# EAGLE board WBDR_02 (EAGLE 9.6.2)
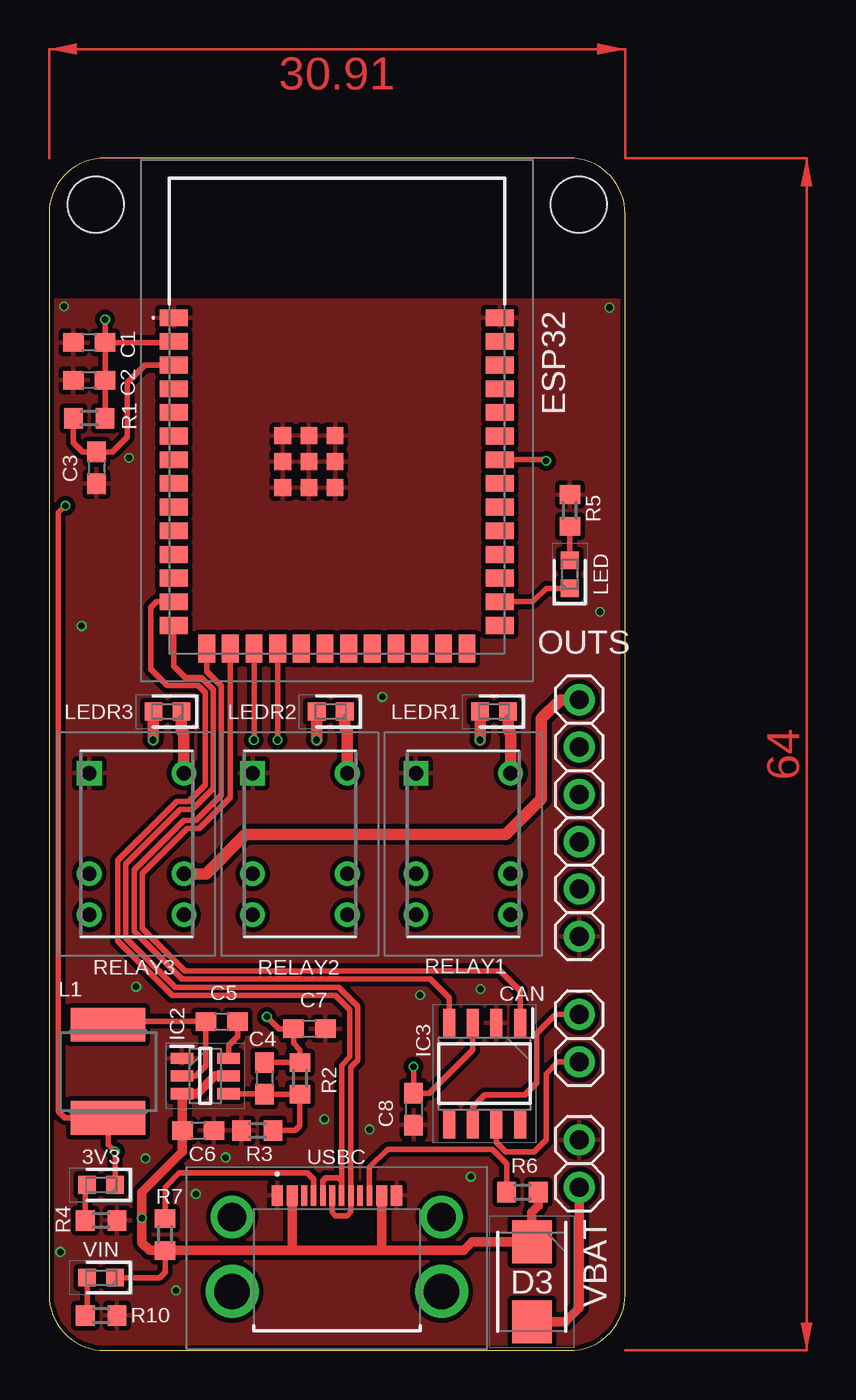
[diagram p0: board, top side]
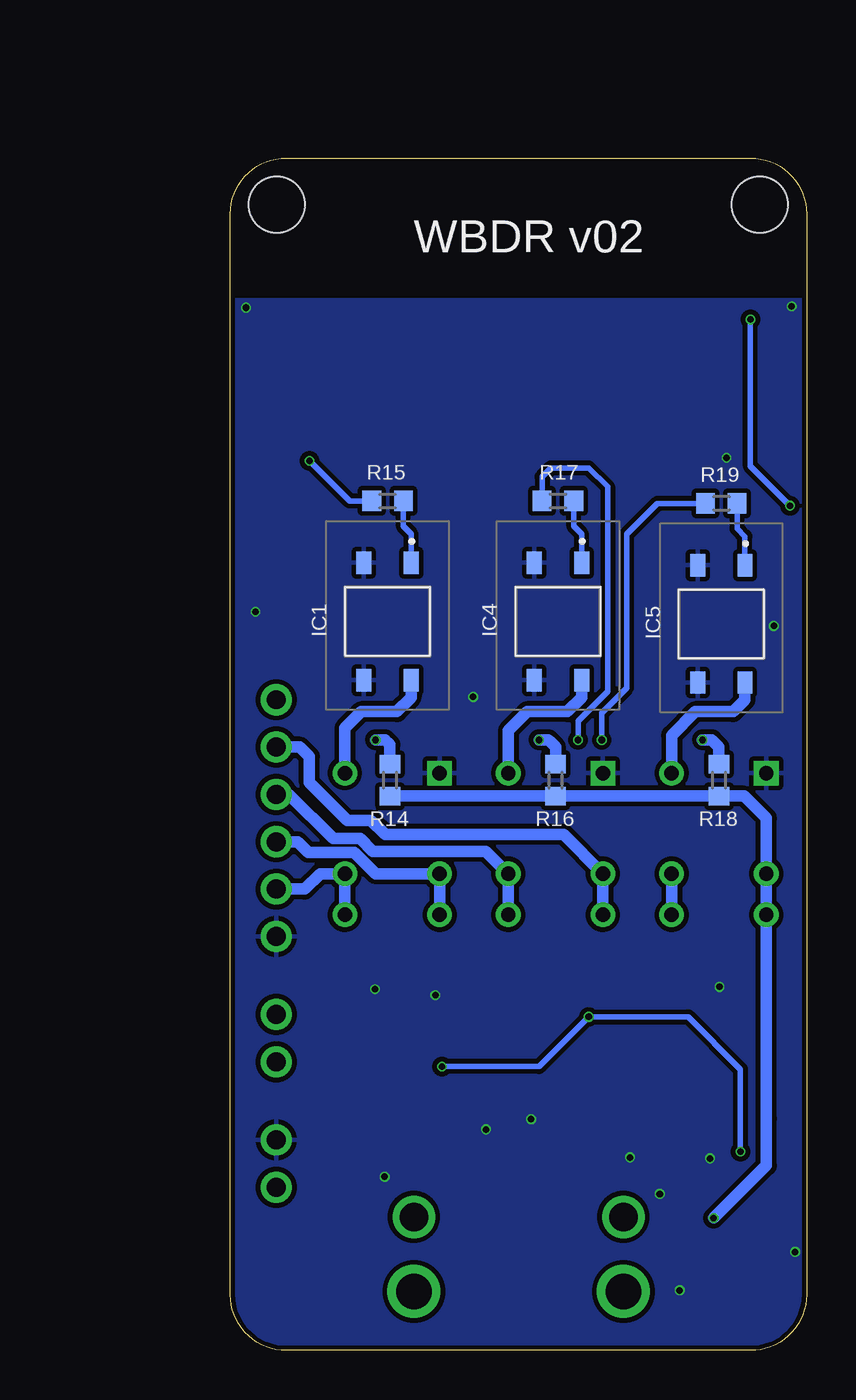
[diagram p1: board, bottom side, seen from below]

Size 30.91 x 64 mm. Coordinates in mm from the lower left corner, seen from the top.
Outline: 30.91,3 30.91,61 arc90 27.91,64 3,64 arc90 0,61 0,3 arc90 3,0 27.91,0 arc90 30.91,3
Copper layers (1*16): Top 0.035559375mm / dielectric 1.6mm / Bottom 0.035559375mm
Design rules "jlcpcb2layer": minimum track width 5mil, minimum drill 12mil, track to track 5mil, track to pad 5mil, pad to pad 5mil, via to via 5mil, smd to smd 5mil, copper to edge 8mil, drill to drill 6mil, minimum pad ring 5mil, minimum via ring 3mil, stop-mask expansion 2.5mil, vias tented up to drill 0mil, thermal gap 10mil
Holes 3 mm at 2.51,61.5 28.42,61.5

## Footprints (pad centres in the part's own frame; a part is rotated, then mirrored left to right if it is on the bottom)
LEDC1608X80N = smd 0.95 x 0.95: 1 -0.75,0; 2 0.75,0
C0603 = smd 1.1 x 1: 1 -0.85,0; 2 0.85,0
1X02 = drill 1.016 pad 1.676: 1 -1.27,0; 2 1.27,0
DIOM5336X320N = smd 2.3 x 2.1: 1 -2.15,0; 2 2.15,0
ESP32S3WROOM1N16 = smd 1.5 x 0.9: 1 -8.75,5.26; 2 -8.75,3.99; 3 -8.75,2.72; 4 -8.75,1.45; 5 -8.75,0.18; 6 -8.75,-1.09; 7 -8.75,-2.36; 8 -8.75,-3.63; 9 -8.75,-4.9; 10 -8.75,-6.17; 11 -8.75,-7.44; 12 -8.75,-8.71; 13 -8.75,-9.98; 14 -8.75,-11.25; 27 8.75,-11.25; 28 8.75,-9.98; 29 8.75,-8.71; 30 8.75,-7.44; 31 8.75,-6.17; 32 8.75,-4.9; 33 8.75,-3.63; 34 8.75,-2.36; 35 8.75,-1.09; 36 8.75,0.18; 37 8.75,1.45; 38 8.75,2.72; 39 8.75,3.99; 40 8.75,5.26 | smd 0.9 x 1.5: 15 -6.985,-12.5; 16 -5.715,-12.5; 17 -4.445,-12.5; 18 -3.175,-12.5; 19 -1.905,-12.5; 20 -0.635,-12.5; 21 0.635,-12.5; 22 1.905,-12.5; 23 3.175,-12.5; 24 4.445,-12.5; 25 5.715,-12.5; 26 6.985,-12.5 | smd 0.9 x 0.9: 41 -1.5,-2.46; 42 -1.5,-1.06; 43 -2.9,-1.06; 44 -2.9,-2.46; 45 -2.9,-3.86; 46 -1.5,-3.86; 47 -0.1,-3.86; 48 -0.1,-2.46; 49 -0.1,-1.06
TLP266J = smd 1.2 x 0.8: 1 -2.525,1.27; 3 -2.525,-1.27; 4 3.775,-1.27; 6 3.775,1.27
SOT95P280X90-6N = smd 1.2 x 0.6: 1 -1.25,0.95; 2 -1.25,0; 3 -1.25,-0.95; 4 1.25,-0.95; 5 1.25,0; 6 1.25,0.95
SOIC127P600X175-8N = smd 1.528 x 0.65: 1 -2.711,1.905; 2 -2.711,0.635; 3 -2.711,-0.635; 4 -2.711,-1.905; 5 2.711,-1.905; 6 2.711,-0.635; 7 2.711,0.635; 8 2.711,1.905
L5650M = smd 1.8 x 4: 1 -2.5,0; 2 2.5,0
1X06 = drill 1.016 pad 1.676: 1 -6.35,0; 2 -3.81,0; 3 -1.27,0; 4 1.27,0; 5 3.81,0; 6 6.35,0
R0603 = smd 1 x 1.1: 1 -0.85,0; 2 0.85,0
14620438 = drill 0.77 pad 1.32 square: 1 0,0 | drill 0.77 pad 1.32: 3 5.4,0; 4 7.6,0; 5 7.6,5.08; 6 5.4,5.08; 8 0,5.08
2169900003 = smd 0.6 x 1.1: A1 -3.2,4; A4 -2.4,4; A9 2.4,4; A12 3.2,4 | smd 0.3 x 1.1: A5 -1.25,4; A6 -0.25,4; A7 0.25,4; A8 1.25,4; B5 1.75,4; B6 0.75,4; B7 -0.75,4; B8 -1.75,4 | drill 1.52 pad 2.28: MH1 -5.62,2.85; MH4 5.62,2.85 | drill 1.9 pad 2.85: MH2 -5.62,-1.15; MH3 5.62,-1.15

## Placement (x,y rotation side)
3V3  150060GS75000  [LEDC1608X80N]  2.79,8.89 180 top
C1  20uF  [C0603]  2.16,54.1 180 top
C2  0.1uF  [C0603]  2.16,52.07 180 top
C3  0.1uF  [C0603]  2.54,47.37 270 top
C4  22pF  [C0603]  11.56,14.61 270 top
C5  100nF  [C0603]  9.27,17.65 0 top
C6  10uF  [C0603]  8,11.81 0 top
C7  22uF  [C0603]  13.97,17.27 0 top
C8  0.1uF  [C0603]  19.56,12.95 270 top
CAN  [1X02]  28.45,16.76 90 top
D3  SS34B-HF  [DIOM5336X320N]  25.91,3.68 270 top
ESP32  ESP32-S3-WROOM-1-N16  [ESP32S3WROOM1N16]  15.44,50.16 0 top
IC1  TLP175A_TPL,E  [TLP266J]  22.48,39.75 270 bottom
IC2  DIO6970TST6  [SOT95P280X90-6N]  8.38,14.73 0 top
IC3  SN65HVD232D  [SOIC127P600X175-8N]  23.37,14.86 270 top
IC4  TLP175A_TPL,E  [TLP266J]  13.34,39.75 270 bottom
IC5  TLP175A_TPL,E  [TLP266J]  4.57,39.62 270 bottom
L1  4.7uH  [L5650M]  3.17,14.99 90 top
LED  150060GS75000  [LEDC1608X80N]  27.94,41.66 90 top
LEDR1  150060GS75000  [LEDC1608X80N]  23.88,34.29 180 top
LEDR2  150060GS75000  [LEDC1608X80N]  15.11,34.29 180 top
LEDR3  150060GS75000  [LEDC1608X80N]  6.35,34.29 180 top
OUTS  [1X06]  28.45,28.57 270 top
R1  10k  [R0603]  2.16,50.04 0 top
R2  40.2k  [R0603]  13.46,14.61 90 top
R3  13k  [R0603]  11.18,11.81 0 top
R4  330  [R0603]  2.79,6.99 0 top
R5  330  [R0603]  27.94,45.09 90 top
R6  5.1k  [R0603]  25.4,8.51 180 top
R7  5.1k  [R0603]  6.22,6.22 270 top
R10  330  [R0603]  2.79,1.88 0 top
R14  2k4  [R0603]  22.35,30.61 270 bottom
R15  330  [R0603]  22.48,45.59 0 bottom
R16  2k4  [R0603]  13.46,30.61 270 bottom
R17  330  [R0603]  13.34,45.59 0 bottom
R18  2k4  [R0603]  4.7,30.61 270 bottom
R19  330  [R0603]  4.57,45.47 0 bottom
RELAY1  1462043-8  [14620438]  19.68,30.99 270 top
RELAY2  1462043-8  [14620438]  10.92,30.99 270 top
RELAY3  1462043-8  [14620438]  2.16,30.99 270 top
USBC  216990-0003  [2169900003]  15.44,4.32 0 top
VBAT  [1X02]  28.45,10.03 90 top
VIN  150060GS75000  [LEDC1608X80N]  2.79,3.91 180 top

## Library data of the parts
3V3 LED LEDR1-LEDR3 VIN = SamacSys_Parts; DESCRIPTION: Wurth Elektronik WL-SMCW 520 nm Green LED, 1608 (0603) Clear SMD package; HEIGHT: 0.8mm; MANUFACTURER_NAME: Wurth Elektronik; MANUFACTURER_PART_NUMBER: 150060GS75000; MOUSER_PART_NUMBER: 710-150060GS75000; MOUSER_PRICE-STOCK: https://www.mouser.co.uk/ProductDetail/Wurth-Elektronik/150060GS75000?qs=LlUlMxKIyB0UYkq5lDO8nA%3D%3D
C1-C8 = rcl
CAN OUTS VBAT = pinhead
D3 = SamacSys_Parts; DESCRIPTION: Schottky Diodes & Rectifiers DIODE SCHOTTKY 3A 40V SMB; HEIGHT: 3.2mm; MANUFACTURER_NAME: Comchip Technology; MANUFACTURER_PART_NUMBER: SS34B-HF; MOUSER_PART_NUMBER: 750-SS34B-HF; MOUSER_PRICE-STOCK: https://www.mouser.co.uk/ProductDetail/Comchip-Technology/SS34B-HF?qs=vmHwEFxEFR9G1M%252BcUPG%2FxQ%3D%3D
ESP32 = ESP32-S3-WROOM-1-N16; DESCRIPTION: WiFi Modules - 802.11 [Engineering Samples] SMD Module, ESP32-S3, 16 MB SPI Flash, PCB Antenna; HEIGHT: 3.25mm; MANUFACTURER_NAME: Espressif Systems; MANUFACTURER_PART_NUMBER: ESP32-S3-WROOM-1-N16; MOUSER_PART_NUMBER: 356-ESP32S3WROOM1N16; MOUSER_PRICE-STOCK: https://www.mouser.co.uk/ProductDetail/Espressif-Systems/ESP32-S3-WROOM-1-N16?qs=Li%252BoUPsLEntjPrtJwwS5Pw%3D%3D
IC1 IC4 IC5 = SamacSys_Parts; DESCRIPTION: MOSFET Output Optocouplers Trigger LED Current 1mA85dC3750 Vrms; HEIGHT: 2mm; MANUFACTURER_NAME: Toshiba; MANUFACTURER_PART_NUMBER: TLP175A(TPL,E; MOUSER_PART_NUMBER: 757-TLP175A(TPLE; MOUSER_PRICE-STOCK: https://www.mouser.co.uk/ProductDetail/Toshiba/TLP175ATPLE?qs=HVbQlW5zcXXp9ILK7hvmMw%3D%3D
IC2 = SamacSys_Parts; DESCRIPTION: Switching Voltage Regulators 2A Step Converter 24V Input Sync; HEIGHT: 0.9mm; MANUFACTURER_NAME: DIOO Microcircuits; MANUFACTURER_PART_NUMBER: DIO6970TST6; MOUSER_PART_NUMBER: 453-DIO6970ST6; MOUSER_PRICE-STOCK: https://www.mouser.co.uk/ProductDetail/DIOO-Microcircuits/DIO6970TST6?qs=%252BEew9%252B0nqrCWpKu8WqElxA%3D%3D
IC3 = SamacSys_Parts; DESCRIPTION: CAN Transceiver 1Mbit/s ISO 11898, 8-Pin SOIC; HEIGHT: 1.75mm; MANUFACTURER_NAME: Texas Instruments; MANUFACTURER_PART_NUMBER: SN65HVD232D; MOUSER_PART_NUMBER: 595-SN65HVD232D; MOUSER_PRICE-STOCK: https://www.mouser.co.uk/ProductDetail/Texas-Instruments/SN65HVD232D?qs=QViXGNcIEAueLIS9b8IyYg%3D%3D
L1 = rcl; SPICEPREFIX: L
R1-R7 R10 R14-R19 = rcl; SPICEPREFIX: R
RELAY1-RELAY3 = SamacSys_Parts; DESCRIPTION: Low Signal Relays - PCB IME06TS=140MW 12V 2NO; HEIGHT: 5.65mm; MANUFACTURER_NAME: TE Connectivity; MANUFACTURER_PART_NUMBER: 1462043-8; MOUSER_PART_NUMBER: 655-1462043-8; MOUSER_PRICE-STOCK: https://www.mouser.co.uk/ProductDetail/TE-Connectivity-PB/1462043-8/?qs=kSbAZawwBnx8XxDvaHw46A%3D%3D
USBC = SamacSys_Parts; DESCRIPTION: USB Connectors Mid-Mnt SMT CH0.58 16Ckt Type C Rec.; HEIGHT: 3.36mm; MANUFACTURER_NAME: Molex; MANUFACTURER_PART_NUMBER: 216990-0003; MOUSER_PART_NUMBER: 538-216990-0003; MOUSER_PRICE-STOCK: https://www.mouser.co.uk/ProductDetail/Molex/216990-0003?qs=DRkmTr78QASn0GILUGAYCA%3D%3D

## Nets
+3V3: 3V3.1 C1.1 C2.1 C4.1 C7.1 C8.1 ESP32.2 IC3.3 L1.1 R1.2 R2.2
BS: C5.2 IC2.6
CANH: CAN.1 IC3.7
CANL: CAN.2 IC3.6
CANRX: ESP32.15 IC3.4
CANTX: ESP32.16 IC3.1
CC1: R7.1 USBC.A5
CC2: R6.2 USBC.B5
COIL1: IC1.6 LEDR1.1 RELAY1.8
COIL2: IC4.6 LEDR2.1 RELAY2.8
COIL3: IC5.6 LEDR3.1 RELAY3.8
EN: C3.1 ESP32.3 R1.1
FB: C4.2 IC2.4 R2.1 R3.2
GND: C1.2 C2.2 C3.2 C6.2 C7.2 C8.2 ESP32.1 ESP32.40 ESP32.41 ESP32.42 ESP32.43 ESP32.44 ESP32.45 ESP32.46 ESP32.47 ESP32.48 ESP32.49 IC1.3 IC1.4 IC2.1 IC3.2 IC4.3 IC4.4 IC5.3 IC5.4 OUTS.6 R3.1 R4.2 R5.2 R10.2 RELAY1.1 RELAY2.1 RELAY3.1 USBC.A1 USBC.A12 VBAT.2
IN1: OUTS.5 RELAY1.5 RELAY1.6
IN2: OUTS.3 RELAY2.5 RELAY2.6
LDR1: 3V3.2 R4.1
LDR2: LED.2 R5.1
LDR3: R10.1 VIN.2
LED2: ESP32.28 LED.1
LEDCOIL1: LEDR1.2 R14.1
LEDCOIL2: LEDR2.2 R16.1
LEDCOIL3: LEDR3.2 R18.1
O1: OUTS.4 RELAY1.3 RELAY1.4
O2: OUTS.2 RELAY2.3 RELAY2.4
O3: OUTS.1 RELAY3.5 RELAY3.6
OUT1: ESP32.34 R15.1
OUT2: ESP32.18 R17.1
OUT3: ESP32.17 R19.1
OUTO1: IC1.1 R15.2
OUTO2: IC4.1 R17.2
OUTO3: IC5.1 R19.2
RX: ESP32.36
SW: C5.1 IC2.2 L1.2
TX: ESP32.37
USBD+: ESP32.14 USBC.A6 USBC.B6
USBD-: ESP32.13 USBC.A7 USBC.B7
VEXT: D3.2 VBAT.1
VIN: C6.1 D3.1 IC2.3 IC2.5 R6.1 R7.2 R14.2 R16.2 R18.2 RELAY3.3 RELAY3.4 USBC.A4 USBC.A9 VIN.1

## Tracks (layer width: path | path; a pad name or v marks a point on that pad's centre or on a via)
+3V3  (via drill 0.35)
  Top 0.305: C4.1 R2.2 13.46,16.13 13.12,16.47 C7.1 12.32,17.27 v11.68,17.91 | C1.1 C2.1 R1.2 | ESP32.2 6.44,54.1 C1.1 | IC3.3 22.73,16.13 20.41,13.8 C8.1 v19.56,15.24 | 3V3.1 v3.54,10.68 3.17,11.05 L1.1 0.85,12.49 0.51,12.83 0.51,44.96 v0.89,45.34 | C1.1 v3.01,55.33
  Bottom 0.305: v19.56,15.24 14.35,15.24 v11.68,17.91 6.35,17.91 3.54,15.1 v3.54,10.68 | v0.89,45.34 3.01,47.46 v3.01,55.33
BS
  Top 0.305: IC2.6 9.63,16.36 10.12,16.85 C5.2
CANH
  Top 0.305: IC3.7 24,11.18 24.51,10.67 26.04,10.67 26.67,11.3 26.67,14.86 27.3,15.49 CAN.1
CANL
  Top 0.305: IC3.6 22.73,13.08 23.37,13.72 25.53,13.72 26.16,14.35 26.16,17.02 27.18,18.03 CAN.2
CANRX
  Top 0.305: IC3.4 21.46,18.92 20.45,19.94 7.11,19.94 4.57,22.48 4.57,25.78 7.24,28.45 7.87,28.45 9.25,29.82 9.25,35.66 8.46,36.45 ESP32.15
CANTX
  Top 0.305: IC3.1 25.27,19.3 24.21,20.37 7.29,20.37 5,22.66 5,25.6 7.42,28.02 8.05,28.02 9.73,29.69 ESP32.16
CC1
  Top 0.305: R7.1 6.22,8.76 6.99,9.53 13.84,9.53 14.19,9.18 USBC.A5
CC2
  Top 0.305: USBC.B5 17.19,9.83 18.16,10.79 23.77,10.79 24.55,10.02 R6.2
COIL1
  Top 0.61: RELAY1.8 24.77,33.13 24.63,33.27 LEDR1.1
  Bottom 0.61: IC1.6 21.21,35.05 21.97,34.29 23.88,34.29 24.77,33.4 RELAY1.8
COIL2
  Top 0.61: LEDR2.1 15.86,33.4 16,33.26 RELAY2.8
  Bottom 0.61: IC4.6 12.06,35.05 12.83,34.29 14.99,34.29 16,33.27 RELAY2.8
COIL3
  Top 0.61: RELAY3.8 7.24,33.15 7.1,33.29 LEDR3.1
  Bottom 0.61: IC5.6 3.3,34.92 3.94,34.29 5.97,34.29 7.24,33.02 RELAY3.8
EN
  Top 0.305: R1.1 1.31,48.73 1.82,48.22 C3.1 3.39,48.22 4.19,49.02 4.19,51.94 5.13,52.88 ESP32.3
FB
  Top 0.305: IC2.4 11.53,13.78 C4.2 R2.1 13.46,12.06 13.21,11.81 R3.2
GND  (via drill 0.35)
  other vias: 9.47,10.36 6.81,3.23 0.61,5.3 17.2,11.86 7.87,8.41 22.63,9.32 5.18,10.31 14.77,12.41 23.15,19.39 19.91,19.08 4.67,19.52 17.88,35.08 4.29,47.9 30.07,55.97 0.8,56.03 29.57,39.65 1.75,38.89
  pour Top (isolate 0.254): 0,56.39 30.99,56.39 30.99,0 0,0
  pour Bottom (isolate 0.254): 0,56.39 30.99,56.39 30.99,0 0,0
IN1
  Bottom 0.61: RELAY1.5 RELAY1.6 26.1,25.59 26.92,24.77 OUTS.5
IN2
  Bottom 0.61: RELAY2.5 RELAY2.6 17.21,26.8 23.28,26.8 23.95,27.47 25.4,27.47 27.77,29.84 OUTS.3
LDR1
  Top 0.305: R4.1 1.94,8.79 3V3.2
LDR2
  Top 0.305: LED.2 R5.1
LDR3
  Top 0.305: VIN.2 2.04,1.98 R10.1
LED2
  Top 0.305: ESP32.28 25.96,40.19 26.68,40.91 LED.1
LEDCOIL1  (via drill 0.35)
  Top 0.61: LEDR1.2 23.13,32.78 v23.11,32.77
  Bottom 0.305: 22.48,32.64 22.61,32.77
  Bottom 0.61: R14.1 22.35,32.51 22.48,32.64 | 22.61,32.77 v23.11,32.77
LEDCOIL2  (via drill 0.35)
  Top 0.61: LEDR2.2 14.36,32.78 v14.35,32.77
  Bottom 0.305: 13.78,32.7 13.84,32.77
  Bottom 0.61: R16.1 13.46,32.38 13.78,32.7 | 13.84,32.77 v14.35,32.77
LEDCOIL3  (via drill 0.35)
  Top 0.61: LEDR3.2 5.59,34.28 v5.59,32.77
  Bottom 0.61: R18.1 4.7,32.38 5.08,32.77 v5.59,32.77
O1
  Bottom 0.61: RELAY1.4 RELAY1.3 23.11,25.59 24.26,26.73 26.73,26.73 27.3,27.3 OUTS.4
O2
  Bottom 0.61: RELAY2.4 RELAY2.3 13.02,27.69 22.61,27.69 23.37,28.45 24.64,28.45 26.67,30.48 26.67,31.88 27.18,32.38 OUTS.2
O3
  Top 0.61: OUTS.1 27.43,34.92 26.42,33.91 26.42,29.59 24.51,27.69 10.54,27.69 8.44,25.59 RELAY3.6
  Bottom 0.61: RELAY3.6 RELAY3.5
OUT1  (via drill 0.35)
  Top 0.305: v26.67,47.75 26.62,47.8 ESP32.34
  Bottom 0.305: R15.1 24.51,45.59 v26.67,47.75
OUT2  (via drill 0.35)
  Top 0.305: ESP32.18 v12.27,32.78 v12.26,32.77
  Bottom 0.305: R17.1 14.19,46.9 13.72,47.37 11.68,47.37 10.67,46.35 10.67,35.37 12.26,33.78 v12.26,32.77
OUT3  (via drill 0.35)
  Top 0.305: ESP32.17 v11,32.78 v10.99,32.77
  Bottom 0.305: R19.1 8,45.47 9.65,43.81 9.65,35.56 10.99,34.23 v10.99,32.77
OUTO1
  Bottom 0.305: IC1.1 21.21,43.81 21.63,44.23 R15.2
OUTO2
  Bottom 0.305: IC4.1 12.06,43.81 12.48,44.23 R17.2
OUTO3
  Bottom 0.305: IC5.1 3.3,43.69 3.72,44.11 R19.2
SW
  Top 0.305: IC2.2 7.87,14.73 8.42,15.28 C5.1 3.34,17.65 L1.2
USBD+
  Top 0.305: USBC.A6 15.19,7.41 15.37,7.24 16,7.24 16.19,7.43 USBC.B6 16.19,15.2 16.56,15.57 16.56,18.47 15.55,19.48 6.78,19.48 4.12,22.15 4.12,26.11 7.04,29.03 7.67,29.03 8.81,30.17 8.81,35.48 8.18,36.12 7.32,36.12 6.69,36.74 ESP32.14
USBD-
  Top 0.305: USBC.B7 14.69,9.11 14.86,9.27 15.49,9.27 15.69,9.07 | 15.69,9.07 USBC.A7 | ESP32.13 5.77,40.19 5.46,39.88 5.46,36.58 6.35,35.69 8,35.69 8.38,35.31 8.38,30.35 7.49,29.46 6.86,29.46 3.68,26.29 3.68,21.97 6.6,19.05 15.37,19.05 16.13,18.29 16.13,15.75 15.69,15.31 15.69,9.07
VEXT
  Top 0.508: VBAT.1 28.45,2.29 27.7,1.53 D3.2
VIN  (via drill 0.35)
  Top 0.305: VIN.1 5.94,3.91 6.22,4.19 R7.2
  Top 0.508: 17.83,5.37 13.11,5.37 13.04,5.44 | USBC.A4 13.04,5.44 | USBC.A9 17.84,5.38 17.83,5.37 | IC2.5 8.89,14.73 7.94,13.78 IC2.3 7.15,13.76 C6.1 7.15,10.65 4.98,8.48 v4.98,7.11 4.98,5.79 5.4,5.37 R7.2 13.04,5.37 13.04,5.44 | R6.1 26.25,7.76 25.91,7.42 D3.1 22.7,5.83 22.24,5.37 17.83,5.37
  Bottom 0.61: v4.98,7.11 2.16,9.93 2.16,12.45 RELAY3.4 RELAY3.3 2.16,28.57 3.34,29.76 R18.2 R16.2 R14.2
(copper drawn outside any net)
  shapes: Top area x2

## Text on the board
bNames: WBDR v02